# Altium PCB CEF JFET.PcbDoc
Units mm, origin at the board's own origin, x right, y up, seen from the top; angles counter-clockwise.
Board outline 80 x 50 mm, 2 copper layers (Top Layer, Bottom Layer); 7 components, 5 nets, 15 pads, 0 vias.
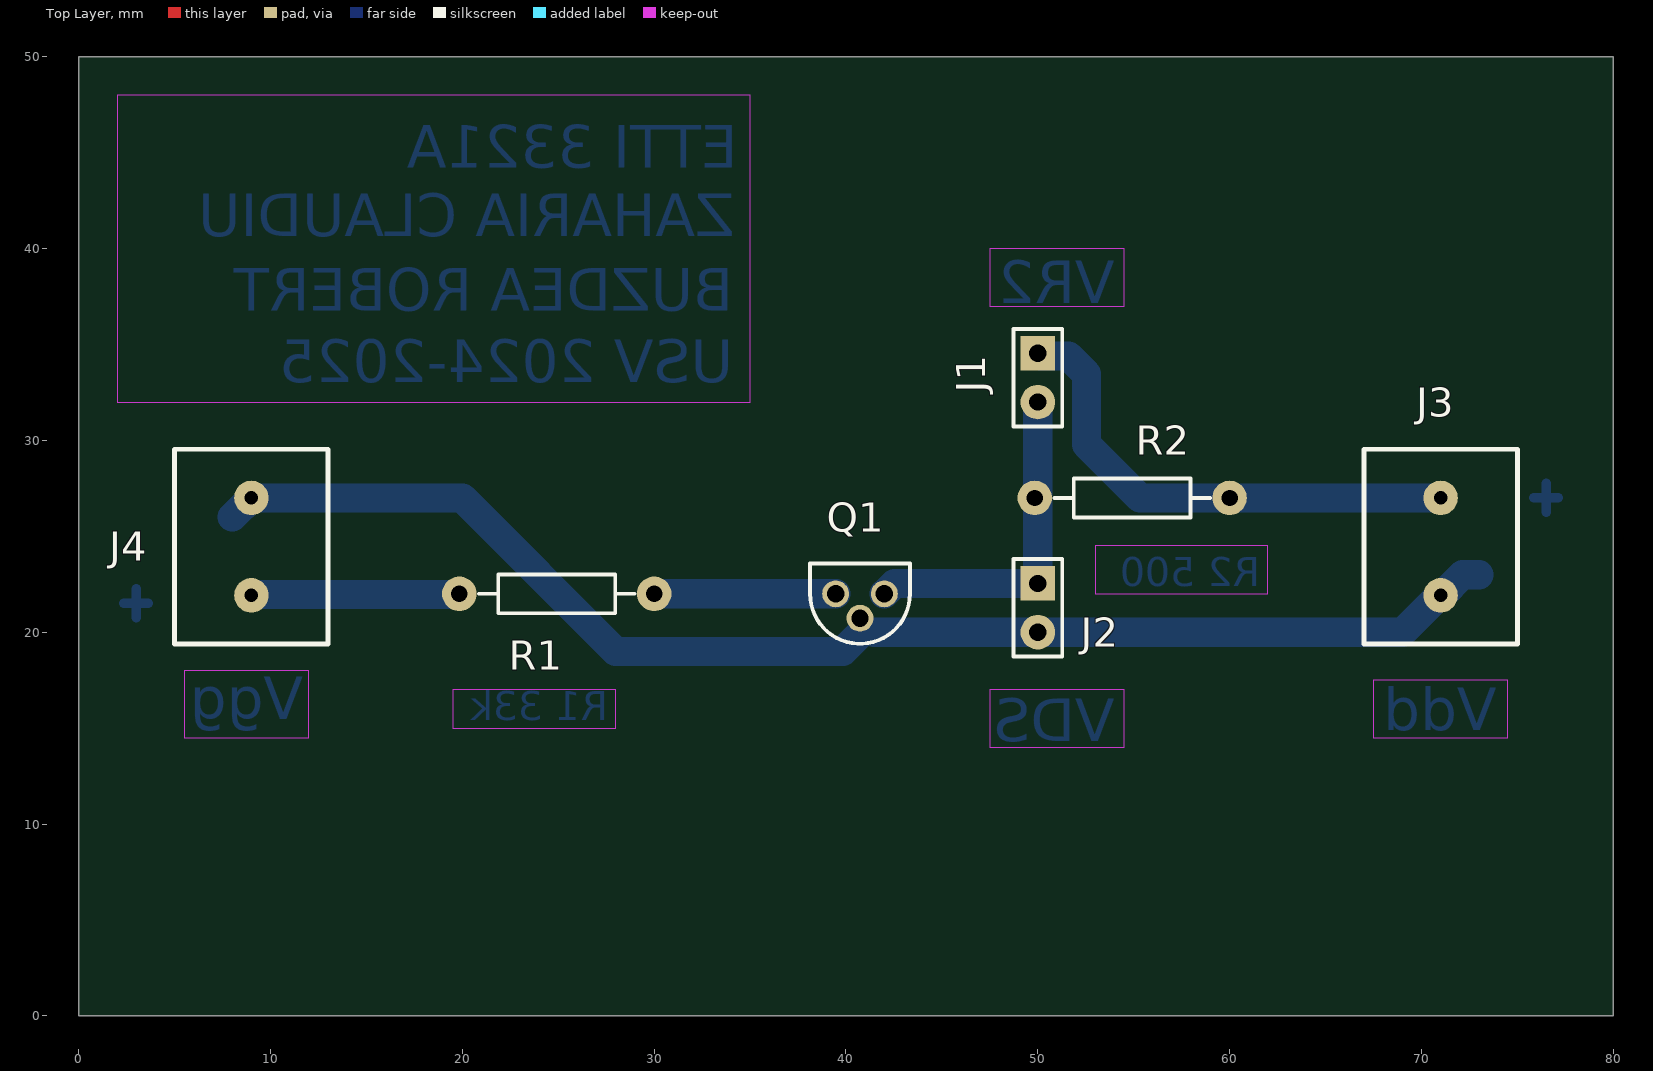
[diagram p0: Top Layer view]
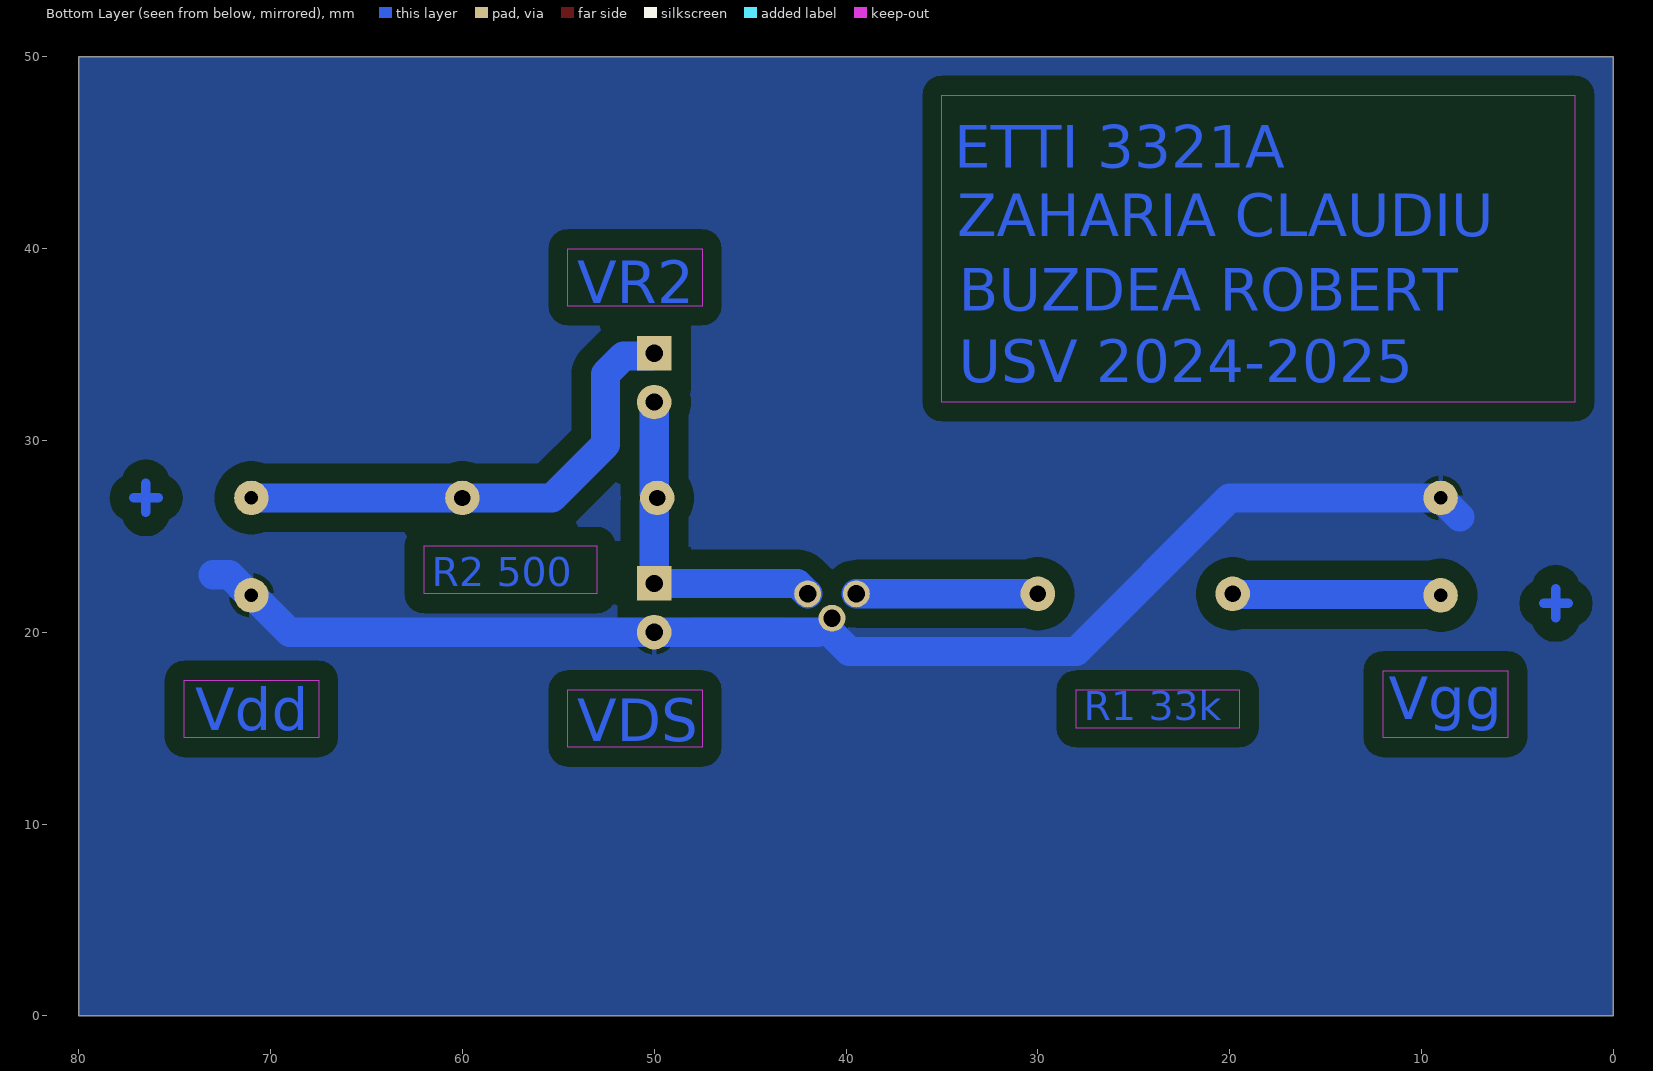
[diagram p1: Bottom Layer view, seen from below]

## Layer stack, top to bottom
Top Solder: solder mask 0.0102, Solder Resist, Dk 3.5
Top Layer: signal copper 0.0356
Dielectric 1: dielectric 0.32, FR-4, Dk 4.8
Bottom Layer: signal copper 0.0356
Bottom Solder: solder mask 0.0102, Solder Resist, Dk 3.5

## Board outline
0,0 0,50 80,50 80,0

## Design rules (kind name [scope] priority, off if disabled: settings)
Clearance [All] p1: gap=0.254 ignorepadtopadclearanceinfootprint=FALSE except(1: Arc-Fill Arc-Poly Arc-Region Track-Fill Track-Poly Track-Region SMDPad-Fill SMDPad-Poly SMDPad-Region THPad-Fill THPad-Poly THPad-Region Via-Fill Via-Poly Via-Region Fill-Fill Fill-Poly Fill-Region Poly-Poly Poly-Region Region-Region)
PlaneConnect [All] p1: planeconnectstyle=Direct reliefexpansion=0.508 reliefentries=4 reliefconductorwidth=0.254 reliefairgap=0.254
PolygonConnect [All] p1: connectstyle=Relief reliefconductorwidth=0.254 reliefentries=4 polygonreliefangle="90 Angle" airgapwidth=0.254
RoutingVias [All] p1: holewidth=0.711 width=1.27 viastyle="Through Hole" minholewidth=0.711 minwidth=1.27 maxholewidth=0.711 maxwidth=1.27
SolderMaskExpansion [All] p1: expansion=0.102 istentingtop=FALSE
SupplyNets "Schematic Supply Nets_1" [InNet('VDD')] p1: voltage=0.000
SupplyNets "Schematic Supply Nets" [InNet('GND')] p2: voltage=0.000
Width [All] p1: maxlimit=1.524 minlimit=0.254 preferedwidth=0.254 minimp=50.000000 maximp=50.000000 favimp=50.000000
29 further rules are at their usual default settings.

## Components (designator, comment, footprint, x,y, rotation, side; value= is the part's Value field where it differs from the comment)
J1 "VR2" HDR_1x2_pin 50,34.54 r90 top
J2 "VDS" HDR_1x2_pin 50,22.54 r90 top
J3 "VDD" HDR_1X2_TE 71,27 r0 top
J4 "VGG" HDR_1X2_TE 9,21.92 r180 top
Q1 "2N5458" FP-29-11-MFG 40.73,21.493 r90 top
R1 "33k" Resistor 19.84,22 r0 top (schematic designator R2)
R2 "500R" Resistor 49.84,27 r0 top (schematic designator R1)

## Footprints (in the part's own frame and the unit in brackets; to place one, negate y for a bottom-side part, rotate by r counter-clockwise, add the part's x,y. Pads: shape width x height; smd on the part's side, far side on the other; paste and mask are expansions set on the pad)
FP-29-11-MFG [mm]
  round 1.4 hole 0.9 paste-2539.97 mask+0: 1(0.507,-1.27) 2(-0.763,0) 3(0.507,1.27)
  silkscreen extent -2.09,-2.6 2.09,2.6, body extent -2.19,-2.7 2.19,2.7, height 0.25
HDR_1x2_pin [mm]
  rect 1.8x1.8 hole 0.9: 1(0,0)
  round 1.8 hole 0.9: 2(-2.54,0)
  silkscreen extent -3.81,-1.27 1.27,1.27
HDR_1X2_TE [mm] "282836-2"
  round 1.8 hole 0.7: 1(0,0) 2(0,-5.08)
  silkscreen extent -4,-7.62 4,2.54
Resistor [mm] "Res_2mm_AxialTH"
  round 1.8 hole 0.85: 1(0,0) 2(10.16,0)
  silkscreen extent 1.02,-1.02 9.14,1.02

## Part data
J1 J2: library part HDR_1x2, "Header, 2-Pin"
J3 J4: library part CON_1x2, "Connector, 2-Ports"
Q1: library part CMP-00278-00153544-1, "2N5458 Small Signal Field-Effect Transistor, 25V, 1-Element, N-Channel, Silicon, Junction FET, TO-92", Breakdown Voltage=25V, Case/Package=TO-92, Continuous Drain Current (ID)=9mA, Current Rating=10mA, Gate to Source Voltage (Vgs)=-25V, Input Capacitance=7pF, Manufacturer Lifecycle Status=OBSOLETE, Max Junction Temperature (Tj)=135°C, Max Power Dissipation=625mW, Min Operating Temperature=-55°C, Drain to Source Breakdown Voltage=25V, Drain to Source Voltage (Vdss)=25V, Element Configuration=Single, Height=7.87mm, Lead Free="Lead Free", Lifecycle Status=Obsolete, Max Operating Temperature=135°C, Mount="Through Hole", NexarPartId=153544, Number of Channels=1, Number of Pins=3, Packaging=Bulk, Power Dissipation=625mW, REACH SVHC="No SVHC", RoHS=Compliant, Voltage Rating (DC)=25V, Weight=201mg
R1 R2: library part "Resistor 0.25W 5mm", "0.25W,Axial"

## Nets (pads, with @x,y where several pads share a name; then routed paths per layer and width w, separated by ;. In a path a pad name is that pad's centre, name@x,y a point inside that pad or via, vN(x,y) a via of type N, cw(c..) or ccw(c..) an arc to the next point about the centre after c; other vN are vias at no path point)
GND: J2.2 J3.2 J4.2 Q1.2 | length 69.6
  Bottom Layer w1.524: 8,26 J4.2 20,27 28,19 39.825,19 40.73,19.905 ; 41.46,20 69.005,20 70.925,21.92 J3.2 71.075,21.92 72.155,23 73,23
NetJ1_2: J1.2 J2.1 Q1.1 R2.1 | length 17.7
  Bottom Layer w1.524: Q1.1 42.54,22.54 J2.1 50,26.765 49.84,26.925 49.84,27.075 50,27.235 J1.2@50,31.925
NetJ4_1: J4.1 R1.1 | length 10.9
  Bottom Layer w1.524: J4.1 9.04,21.96 19.8,21.96 R1.1
NetQ1_3: Q1.3 R1.2 | length 9.5
  Bottom Layer w1.524: R1.2 Q1.3
VDD: J1.1 J3.1 R2.2 | length 26.3
  Bottom Layer w1.524: J1.1 50.138,34.402 51.598,34.402 52.54,33.46 52.54,29.785 55.325,27 R2.2 J3.1
copper on no net: | length 5.5
  Bottom Layer w0.5: 2.35,21.5 3,21.5 3.625,21.5 ; 3,20.75 3,22.25 ; 75.85,27 76.5,27 77.125,27 ; 76.5,26.25 76.5,27.75

## Polygon pours and split planes (outlines as drawn)
GND on Bottom Layer "GND_L02_P000" (solid, pour order 0): 0,0 0,50 80,50 80,0

## Keep-outs
Keep-Out Layer:
  rectangle: 67.5,14.5 74.5,17.5
  rectangle: 47.5,37 54.5,40
  rectangle: 53,22 62,24.5
  rectangle: 5.5,14.5 12,18
  rectangle: 19.5,15 28,17
  rectangle: 47.5,14 54.5,17
  rectangle: 2,32 35,48

## Other copper
Bottom Layer:
  text "ETTI 3321A" at 34.35,44.225 h2.2
  text "ZAHARIA CLAUDIU" at 34.2,40.65 h2.2
  text "VR2" at 54,37.15 h2.2
  text "BUZDEA ROBERT" at 34.125,36.75 h2.2
  text "USV 2024-2025" at 34.125,33.025 h2.2
  text "R2 500" at 61.6,22.4 h1.5
  text "Vgg" at 11.7,15.458 h2.2
  text "R1 33k" at 27.6,15.4 h1.5
  text "Vdd" at 73.925,14.875 h2.2
  text "VDS" at 54,14.325 h2.2

## Silkscreen, mask and mechanical layers (free items; w line width, h text height)
Mechanical 1:
  the board outline again, w0.254